# EAGLE board pcb - vcf et etage sortie v3 (EAGLE 9.5.2)
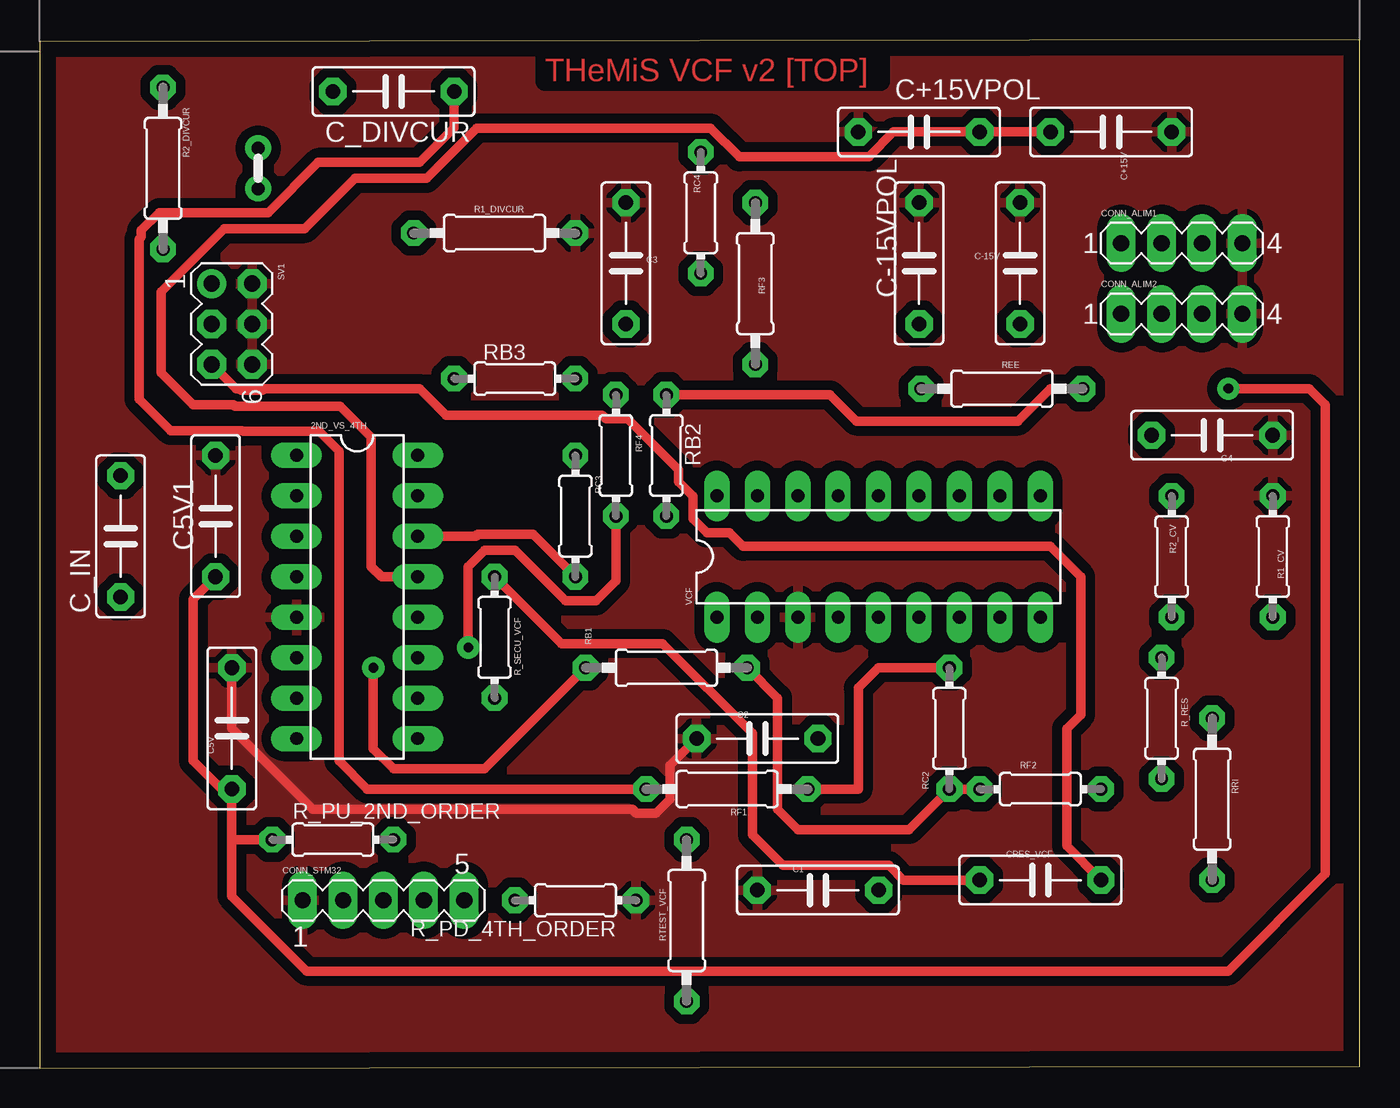
[diagram p0: board, top side]
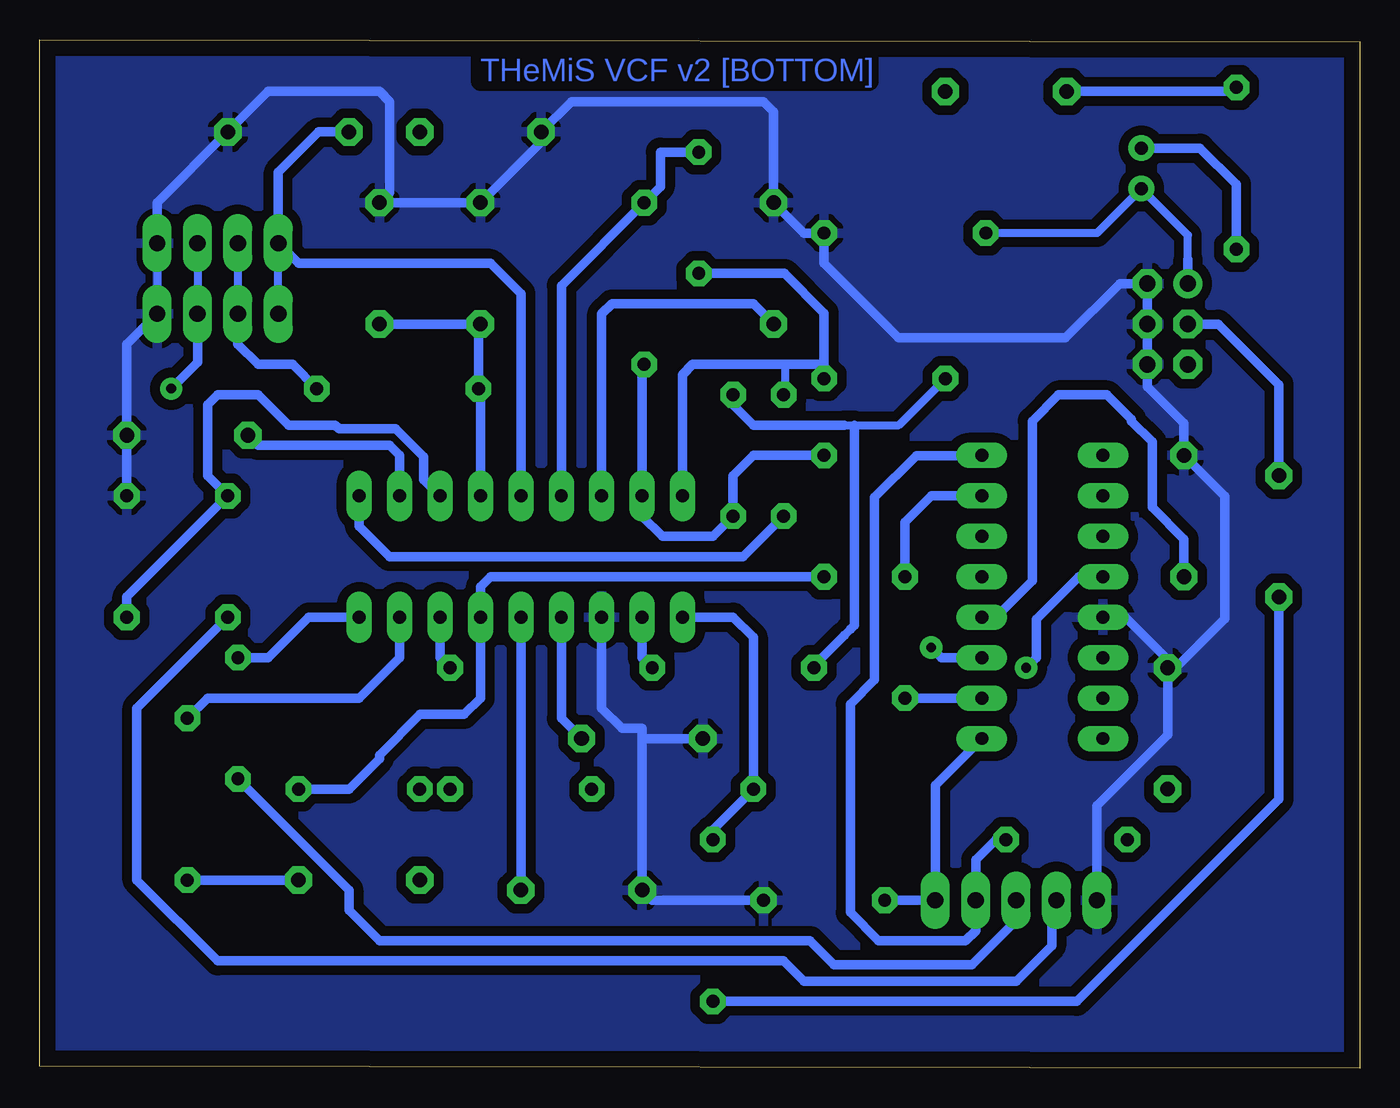
[diagram p1: board, bottom side, seen from below]

Size 82.93 x 64.59 mm. Coordinates in mm from the lower left corner, seen from the top.
Outline: 0,0 82.93,0.13 82.93,64.59 0,64.46 0,0
Copper layers (1*16): Top 0.035mm / dielectric 1.5mm / Bottom 0.035mm
Design rules "ENSEA_2019": minimum track width 0.4mm, minimum drill 0.6mm, track to track 0.4mm, track to pad 0.4mm, pad to pad 0.4mm, via to via 0.4mm, smd to smd 0.4mm, copper to edge 1mm, drill to drill 0.4mm, minimum pad ring 0.4mm, minimum via ring 0.4mm, stop-mask expansion 4mil, vias tented up to drill 0mil, thermal gap 0.4mm

## Footprints (pad centres in the part's own frame; a part is rotated, then mirrored left to right if it is on the bottom)
DIL16 = drill 0.813 long: 1 -8.89,-3.81; 2 -6.35,-3.81; 3 -3.81,-3.81; 4 -1.27,-3.81; 5 1.27,-3.81; 6 3.81,-3.81; 7 6.35,-3.81; 8 8.89,-3.81; 9 8.89,3.81; 10 6.35,3.81; 11 3.81,3.81; 12 1.27,3.81; 13 -1.27,3.81; 14 -3.81,3.81; 15 -6.35,3.81; 16 -8.89,3.81
C075-032X103 = drill 0.914 octagon: 1 -3.81,0; 2 3.81,0
MA04-1 = drill 1.016 long: 1 -3.81,0; 2 -1.27,0; 3 1.27,0; 4 3.81,0
MA05-1 = drill 1.016 long: 1 -5.08,0; 2 -2.54,0; 3 0,0; 4 2.54,0; 5 5.08,0
JUMPER = drill 0.813: 1 -1.27,0; 2 1.27,0
0204/7 = drill 0.813 octagon: 1 -3.81,0; 2 3.81,0
0207/10 = drill 0.813 octagon: 1 -5.08,0; 2 5.08,0
MA03-2 = drill 1.016: 1 -2.54,-1.27 | drill 1.016 octagon: 2 -2.54,1.27; 3 0,-1.27; 4 0,1.27; 5 2.54,-1.27; 6 2.54,1.27
DIL18 = drill 0.813 long: 1 -10.16,-3.81; 2 -7.62,-3.81; 3 -5.08,-3.81; 4 -2.54,-3.81; 5 0,-3.81; 6 2.54,-3.81; 7 5.08,-3.81; 8 7.62,-3.81; 9 10.16,-3.81; 10 10.16,3.81; 11 7.62,3.81; 12 5.08,3.81; 13 2.54,3.81; 14 0,3.81; 15 -2.54,3.81; 16 -5.08,3.81; 17 -7.62,3.81; 18 -10.16,3.81

## Placement (x,y rotation side)
2ND_VS_4TH  ADG411N  [DIL16]  19.94,29.59 270 top
C1  300p  [C075-032X103]  48.9,11.18 0 top
C2  300p  [C075-032X103]  45.09,20.7 0 top
C3  300p  [C075-032X103]  36.83,50.55 270 top
C4  300p  [C075-032X103]  73.66,39.75 180 top
C5V  100n  [C075-032X103]  12.06,21.34 90 top
C5V1  100n  [C075-032X103]  11.05,34.67 90 top
C+15V  100n  [C075-032X103]  67.31,58.8 180 top
C+15VPOL  1u  [C075-032X103]  55.24,58.8 0 top
C-15V  100n  [C075-032X103]  61.59,50.55 90 top
C-15VPOL  1u  [C075-032X103]  55.24,50.55 90 top
C_DIVCUR  1u  [C075-032X103]  22.23,61.34 180 top
C_IN  470n  [C075-032X103]  5.08,33.4 90 top
CONN_ALIM1  [MA04-1]  71.75,51.82 0 top
CONN_ALIM2  [MA04-1]  71.75,47.37 0 top
CONN_STM32  [MA05-1]  21.59,10.54 0 top
CRES_VCF  1u  [C075-032X103]  62.87,11.81 0 top
JP_MIXER_OUT  JUMPER_WIRE  [JUMPER]  13.72,56.52 90 top
R1_CV  10k  [0204/7]  77.47,32.13 90 top
R1_DIVCUR  470  [0207/10]  28.57,52.45 0 top
R2_CV  100k  [0204/7]  71.12,32.13 270 top
R2_DIVCUR  470  [0207/10]  7.75,56.52 270 top
R_PD_4TH_ORDER  100k  [0204/7]  33.66,10.54 180 top
R_PU_2ND_ORDER  100k  [0204/7]  18.41,14.35 0 top
R_RES  100k  [0204/7]  70.48,21.97 270 top
R_SECU_VCF  1k  [0204/7]  28.57,27.05 270 top
RB1  220k  [0207/10]  39.37,25.15 0 top
RB2  220k  [0204/7]  39.37,38.48 270 top
RB3  220k  [0204/7]  29.84,43.31 0 top
RC2  91k  [0204/7]  57.15,21.34 90 top
RC3  91k  [0204/7]  33.66,34.67 270 top
RC4  91k  [0204/7]  41.53,53.72 90 top
REE  1.5k  [0207/10]  60.45,42.67 180 top
RF1  100k  [0207/10]  43.18,17.53 180 top
RF2  100k  [0204/7]  62.87,17.53 0 top
RF3  100k  [0207/10]  44.96,49.28 90 top
RF4  100k  [0204/7]  36.2,38.48 270 top
RRI  51k  [0207/10]  73.66,16.89 270 top
RTEST_VCF  91k  [0207/10]  40.64,9.27 90 top
SV1  [MA03-2]  12.06,46.74 270 top
VCF  AS3320  [DIL18]  52.7,32.13 0 top

## Library data of the parts
2ND_VS_4TH = analog-devices; MF: ALTERA CORPORATION; MPN: ADG411BN; OC_FARNELL: 1424317; OC_NEWARK: 05F6198
C1-C4 C5V C5V1 C+15V C+15VPOL C-15V C-15VPOL C_DIVCUR C_IN CRES_VCF = rcl; SPICEPREFIX: C
CONN_ALIM1 CONN_ALIM2 CONN_STM32 SV1 = con-lstb; OC_FARNELL: unknown; OC_NEWARK: unknown
JP_MIXER_OUT = 6P1_EVB
R1_CV R1_DIVCUR R2_CV R2_DIVCUR R_PD_4TH_ORDER R_PU_2ND_ORDER R_RES R_SECU_VCF RB1-RB3 RC2-RC4 REE RF1-RF4 RRI RTEST_VCF = rcl; SPICEPREFIX: R
VCF = analog-audio-chips

## Nets
5V: 2ND_VS_4TH.12 C5V1.1 C5V.1 CONN_ALIM1.3 CONN_ALIM2.3 R_PU_2ND_ORDER.1
+15V: 2ND_VS_4TH.13 C+15V.2 C+15VPOL.2 CONN_ALIM1.1 CONN_ALIM2.1 VCF.14
-15V: 2ND_VS_4TH.4 CONN_ALIM1.2 CONN_ALIM2.2 RB1.1 RB2.1 RB3.1 REE.1
AGND: 2ND_VS_4TH.5 C1.1 C2.1 C3.1 C4.1 C5V1.2 C5V.2 C+15V.1 C+15VPOL.1 C-15V.2 C-15VPOL.2 CONN_ALIM1.4 CONN_ALIM2.4 CONN_STM32.1 R1_CV.2 R1_DIVCUR.2 R_PD_4TH_ORDER.1 SV1.2 SV1.4 SV1.6 VCF.3
CV_CUTOFF: CONN_STM32.2 R2_CV.2
CV_RES: CONN_STM32.3 R_RES.2
I_IN: JP_MIXER_OUT.1 R1_DIVCUR.1 SV1.1
IN2: RB1.2 RC2.1 RF2.1 VCF.2
IN3: RB2.2 RC3.1 RF3.1 VCF.17
IN4: RB3.2 RC4.1 RF4.1 VCF.18
IN_2NDORDER: 2ND_VS_4TH.16 CONN_STM32.4 R_PU_2ND_ORDER.2
IN_4THORDER: 2ND_VS_4TH.9 CONN_STM32.5 R_PD_4TH_ORDER.2
N$1: C_IN.1 RTEST_VCF.1
N$58: 2ND_VS_4TH.15 CRES_VCF.1 R_SECU_VCF.1
N$73: 2ND_VS_4TH.10 R_SECU_VCF.2
N$75: C_DIVCUR.2 R2_DIVCUR.1
N$79: JP_MIXER_OUT.2 R2_DIVCUR.2
OUT: CRES_VCF.2 RRI.2 SV1.5
OUT1: RC2.2 RF1.1 VCF.7
OUT2: 2ND_VS_4TH.14 RC3.2 RF2.2 VCF.6
OUT3: RC4.2 RF3.2 VCF.15
OUT4: 2ND_VS_4TH.11 RF4.2 VCF.10
V_IN: C_IN.2 SV1.3
VCAP1: C1.2 VCF.5
VCAP2: C2.2 VCF.4
VCAP3: C3.2 VCF.16
VCAP4: C4.2 VCF.11
VCF_FREQ_CV: R1_CV.1 R2_CV.1 VCF.12
VCF_IN: C_DIVCUR.1 RF1.2 RTEST_VCF.2 VCF.1
VCF_RES_CUR: R_RES.1 VCF.9
VEE: C-15V.1 C-15VPOL.1 REE.2 VCF.13
VIN_RES: RRI.1 VCF.8

## Tracks (layer width: path | path; a pad name or v marks a point on that pad's centre or on a via)
5V  (via drill 0.6)
  Top 0.61: C5V1.1 9.65,29.46 9.65,19.3 11.43,17.53 C5V.1 12.06,14.35 | 12.06,14.35 12.06,10.79 16.76,6.1 74.68,6.1 80.77,12.19 80.77,41.66 79.76,42.67 v74.68,42.67 | R_PU_2ND_ORDER.1 12.06,14.35
  Bottom 0.508: CONN_ALIM1.3 CONN_ALIM2.3
  Bottom 0.61: 2ND_VS_4TH.12 22.86,28.32 20.57,30.61 20.57,40.64 18.92,42.29 15.88,42.29 14.35,40.76 14.35,40.64 13.04,39.34 13.04,35.22 11.05,33.22 C5V1.1 | CONN_ALIM2.3 73.03,44.32 v74.68,42.67
+15V
  Top 0.61: 2ND_VS_4TH.13 21.46,30.86 20.83,31.5 20.83,39.62 18.88,41.57 12.25,41.57 12.17,41.66 9.65,41.66 7.62,43.69 7.62,48.77 11.58,52.72 16.66,52.72 19.82,55.89 24.29,55.89 27.45,59.04 42.16,59.04 43.96,57.24 52.08,57.24 53.64,58.8 C+15VPOL.2 C+15V.2
  Bottom 0.508: CONN_ALIM2.1 CONN_ALIM1.1
  Bottom 0.61: C+15V.2 65.41,58.8 67.94,56.26 CONN_ALIM1.1 66.67,50.55 54.61,50.55 52.7,48.64 VCF.14
-15V  (via drill 0.6)
  Top 0.61: RB1.1 27.94,18.8 22.23,18.8 20.95,20.07 v20.95,25.15 | RB2.1 49.66,42.29 51.31,40.64 61.47,40.64 63.5,42.67 REE.1
  Bottom 0.508: CONN_ALIM1.2 CONN_ALIM2.2 | 32,27.56 32.38,27.18 | 32.38,40.39 31.75,40.39 28.96,40.39 RB3.1
  Bottom 0.61: CONN_ALIM2.2 70.48,45.47 69.22,44.2 67.06,44.2 REE.1 | RB1.1 34.29,25.27 32.38,27.18 | 32.38,40.39 38.1,40.39 39.37,41.66 RB2.1 | 2ND_VS_4TH.4 17.65,30.86 20.32,28.19 20.32,25.78 v20.95,25.15 | 31.75,40.39 31.75,27.81 32,27.56
AGND
  Top 0.61: C5V.2 12.06,21.34 17.14,16.26 37.23,16.26 37.47,16.01 38.73,16.01 39.61,16.9 39.61,19.04 C2.1
  Bottom 0.508: CONN_ALIM1.4 CONN_ALIM2.4
  Bottom 0.61: CONN_ALIM2.4 77.47,45.47 C4.1 R1_CV.2 | CONN_ALIM1.4 75.56,54.36 C+15V.1 68.58,61.34 61.59,61.34 60.96,60.71 60.96,54.99 C-15V.2 C-15VPOL.2 51.44,58.17 C+15VPOL.1 49.53,60.71 37.47,60.71 36.83,60.07 C3.1 34.92,52.45 R1_DIVCUR.2 33.66,50.55 28.97,45.86 18.5,45.86 15.08,49.28 SV1.2 SV1.4 SV1.6 13.34,42.8 11.05,40.51 C5V1.2 8.47,35.9 8.47,28.23 12.06,24.64 | VCF.3 47.62,22.61 46.35,21.34 45.09,21.34 45.09,20.7 | 45.09,20.7 C2.1 | 2ND_VS_4TH.5 14.73,28.32 12.06,25.65 C5V.2 12.06,24.64 | CONN_STM32.1 16.51,16.49 12.06,20.93 12.06,24.64 | 45.09,20.7 C1.1 44.45,10.54 R_PD_4TH_ORDER.1
  pour Bottom (isolate 0.61): 0,64.52 82.55,64.52 82.55,0 0,0
  pour Top (isolate 0.61): 0.13,64.52 83.19,64.52 83.19,0.13 0.13,0.13
CV_CUTOFF
  Bottom 0.61: CONN_STM32.2 19.34,10.25 19.34,7.7 21.58,5.46 34.92,5.46 36.2,6.73 71.75,6.73 76.83,11.81 76.83,22.61 R2_CV.2
CV_RES
  Bottom 0.61: CONN_STM32.3 21.88,10.25 21.88,8.96 24.36,6.49 33.02,6.49 34.53,8 61.59,8 63.5,9.91 63.5,11.18 R_RES.2
I_IN
  Bottom 0.508: 10.79,50.8 10.79,52.32 JP_MIXER_OUT.1 16.51,52.45 R1_DIVCUR.1
  Bottom 0.61: SV1.1 10.79,50.8
IN2
  Top 0.61: RF2.1 RC2.1 54.61,14.99 47.62,14.99 46.35,16.26 46.35,23.24 RB1.2
  Bottom 0.61: RB1.2 45.09,25.78 VCF.2
IN3
  Bottom 0.61: RF3.1 45.09,44.07 VCF.17 45.09,34.67 43.81,33.4 40.64,33.4 RB2.2 39.37,37.21 38.1,38.48 RC3.1
IN4
  Bottom 0.508: RF4.1 36.07,42.42 36.07,44.2 | RB3.2 33.66,43.82 34.04,44.2
  Bottom 0.61: VCF.18 42.55,43.56 41.91,44.2 36.07,44.2 34.04,44.2 33.66,44.2 33.66,47.43 36.14,49.91 RC4.1
IN_2NDORDER
  Bottom 0.61: 2ND_VS_4TH.16 23.76,38.47 27.86,38.47 30.48,35.84 30.48,24.38 32,22.86 32,9.78 30.23,8 24.77,8 24.13,8.64 CONN_STM32.4 24.13,13.08 22.86,14.35 R_PU_2ND_ORDER.2
IN_4THORDER
  Bottom 0.61: 2ND_VS_4TH.9 26.67,17.78 CONN_STM32.5 R_PD_4TH_ORDER.2
N$1
  Bottom 0.61: C_IN.1 5.08,16.89 17.78,4.19 RTEST_VCF.1
N$58
  Top 0.61: R_SECU_VCF.1 32.78,26.66 39.13,26.66 44.77,21.02 44.77,14.67 46.7,12.74 53.35,12.74 54.28,11.81 CRES_VCF.1
  Bottom 0.61: 2ND_VS_4TH.15 26.92,35.94 28.57,34.29 R_SECU_VCF.1
N$73
  Bottom 0.61: 2ND_VS_4TH.10 R_SECU_VCF.2
N$75
  Bottom 0.61: C_DIVCUR.2 8,61.34 R2_DIVCUR.1
N$79
  Bottom 0.61: JP_MIXER_OUT.2 10.03,57.79 7.75,55.5 R2_DIVCUR.2
OUT
  Top 0.61: CRES_VCF.2 64.53,13.96 64.53,21.33 65.41,22.2 65.41,30.86 63.5,32.77 44.2,32.77 43.34,33.62 41.92,33.62 41.03,34.51 41.03,35.93 40.13,36.83 40.13,37.59 36.94,40.78 35.57,40.78 35.34,41.01 25.54,41.01 23.88,42.67 14.09,42.67 14,42.58 12.67,42.58 12.59,42.67 12.32,42.67 SV1.5
  Bottom 0.61: RRI.2 CRES_VCF.2
OUT1
  Top 0.61: RC2.2 52.7,25.15 51.44,23.88 51.44,17.53 RF1.1
  Bottom 0.61: VCF.7 57.78,25.78 RC2.2
OUT2
  Top 0.61: 2ND_VS_4TH.14 27.4,33.4 27.52,33.52 30.99,33.52 RC3.2
  Bottom 0.61: RF2.2 63.5,17.53 61.59,19.43 61.59,19.66 59.05,22.21 56.27,22.21 55.24,23.24 VCF.6 55.24,30.23 54.61,30.86 RC3.2
OUT3
  Bottom 0.61: RC4.2 43.94,57.53 43.94,55.37 RF3.2 50.16,49.15 VCF.15
OUT4  (via drill 0.6)
  Top 0.61: v26.92,26.42 26.92,31.5 27.94,32.51 29.87,32.51 33.03,29.35 34.94,29.35 36.2,30.61 RF4.2
  Bottom 0.61: VCF.10 62.87,34.04 60.96,32.13 38.73,32.13 RF4.2 | 2ND_VS_4TH.11 26.29,25.78 v26.92,26.42
V_IN
  Bottom 0.61: SV1.3 8.89,46.74 5.08,42.93 C_IN.2
VCAP1
  Bottom 0.61: VCF.5 C1.2
VCAP2
  Bottom 0.61: VCF.4 50.16,21.97 C2.2
VCAP3
  Bottom 0.61: VCF.16 47.62,47.37 46.99,48.01 38.1,48.01 C3.2
VCAP4
  Bottom 0.61: C4.2 69.22,39.12 60.96,39.12 60.33,38.48 VCF.11
VCF_FREQ_CV
  Bottom 0.61: VCF.12 58.81,36.97 58.81,38.4 60.56,40.15 64.13,40.15 64.37,40.39 67.31,40.39 69.22,42.29 71.75,42.29 72.39,41.66 72.39,37.21 R2_CV.1 77.47,29.59 R1_CV.1
VCF_IN
  Top 0.61: RF1.2 20.57,17.53 18.8,19.3 18.8,38.76 17.56,39.99 12.76,39.99 12.71,40.04 8.22,40.04 6.24,42.02 6.24,52.06 6.38,52.21 6.38,52.61 7.51,53.73 14.34,53.73 17.5,56.9 23.88,56.9 26.04,59.05 C_DIVCUR.1
  Bottom 0.61: VCF.1 39.37,28.32 38.1,27.05 RF1.2 40.64,14.99 RTEST_VCF.2
VCF_RES_CUR
  Bottom 0.61: VCF.9 66.04,28.32 68.58,25.78 R_RES.1
VEE
  Bottom 0.61: C-15V.1 C-15VPOL.1 55.37,46.61 REE.2 55.24,42.55 VCF.13
VIN_RES
  Bottom 0.61: RRI.1 72.39,23.24 62.87,23.24 60.33,25.78 VCF.8

## Text on the board
Top: THeMiS VCF v2 [TOP]
Bottom: THeMiS VCF v2 [BOTTOM]